# Altium PCB LaserTagJoystickBoard.PcbDoc
Units mil, origin at the board's own origin, x right, y up, seen from the top; angles counter-clockwise.
Board outline 600 x 900 mil, 2 copper layers (Top Layer, Bottom Layer); 2 components, 38 nets, 17 pads, 2 vias.
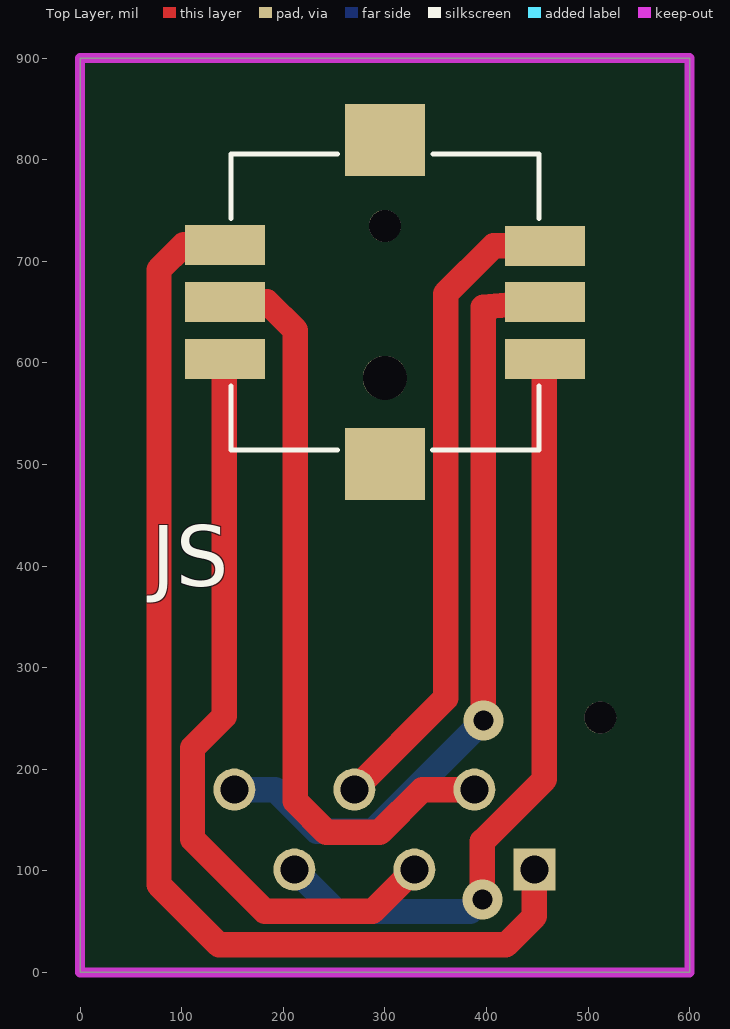
[diagram p0: Top Layer view]
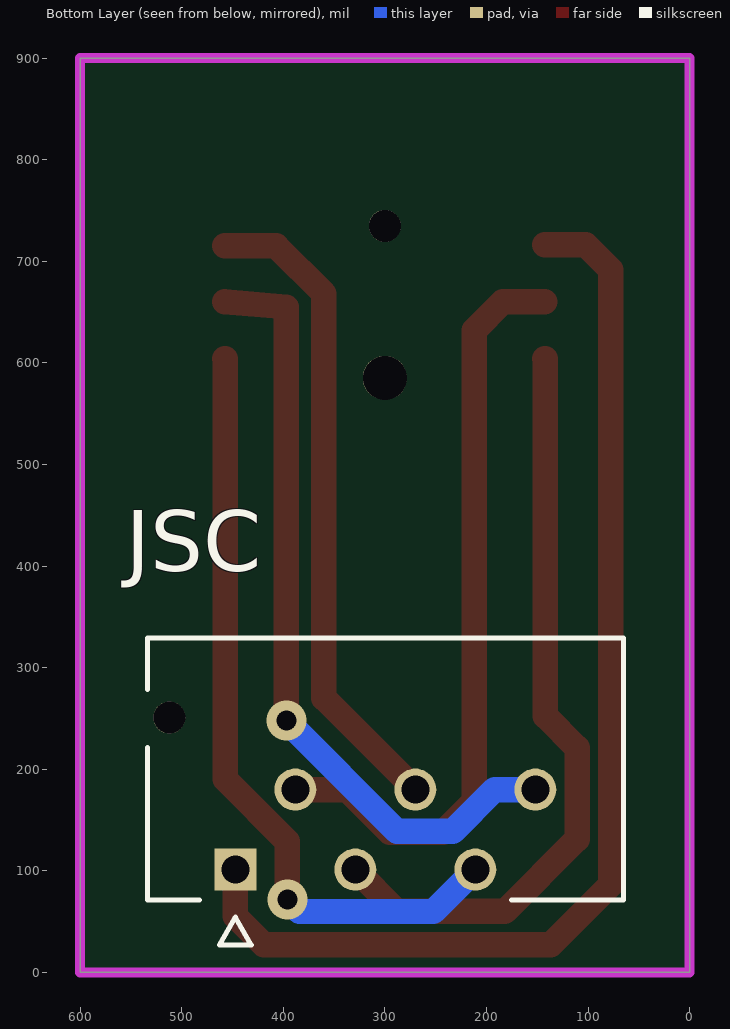
[diagram p1: Bottom Layer view, seen from below]

## Layer stack, top to bottom
Top Solder: solder mask 0.4, Solder Resist, Dk 3.5
Top Layer: signal copper 1.4
Dielectric 1: dielectric 12.6, FR-4, Dk 4.8
Bottom Layer: signal copper 1.4
Bottom Solder: solder mask 0.4, Solder Resist, Dk 3.5

## Board outline
0,0 600,0 600,900 0,900

## Design rules (kind name [scope] priority, off if disabled: settings)
BoardOutlineClearance [All] p1: gap=7.87 ignorepadtopadclearanceinfootprint=FALSE except(15.75: Arc-SplitBarrior Arc-SplitContinuation Track-SplitBarrior Track-SplitContinuation SMDPad-SplitBarrior SMDPad-SplitContinuation THPad-SplitBarrior THPad-SplitContinuation Via-SplitBarrior Via-SplitContinuation Fill-SplitBarrior Fill-SplitContinuation Poly-SplitBarrior Poly-SplitContinuation Region-SplitBarrior Region-SplitContinuation Text-SplitBarrior Text-SplitContinuation)
Clearance "Clearance Bottom Layer" [OnLayer('Bottom Layer')] p1: gap=8 ignorepadtopadclearanceinfootprint=TRUE except(10: Arc-Text Track-Text SMDPad-Text THPad-Text Via-Text Fill-Text Poly-Text Region-Text Text-Text)
Clearance "Clearance Top Layer" [OnLayer('Top Layer')] p2: gap=8 ignorepadtopadclearanceinfootprint=TRUE except(10: Arc-Text Track-Text SMDPad-Text THPad-Text Via-Text Fill-Text Poly-Text Region-Text Text-Text)
Clearance [All] p3: gap=7.87 ignorepadtopadclearanceinfootprint=FALSE except(3.5: Arc-Arc Arc-Track Arc-SMDPad Track-Track Track-SMDPad SMDPad-SMDPad; 5: Arc-Via Track-Via SMDPad-Via THPad-Via Via-Via; 10: Arc-Text Track-Text SMDPad-Text THPad-Text Via-Text Fill-Text Poly-Text Region-Text Text-Text)
HoleSize [All] p1: absolutevalues=TRUE maxlimit=248.03 minlimit=7.87 maxpercent=80.000 minpercent=20.000
MinimumAnnularRing [All] p1: minimumring=3
MinimumSolderMaskSliver [All] p1: minsoldermaskwidth=3.94
PolygonConnect PolygonConnect_1 [All] p1: thpad.connectstyle=Relief thpad.reliefconductorwidth=20 thpad.reliefentries=4 thpad.polygonreliefangle="90 Angle" thpad.airgapwidth=10 smdpad.connectstyle=Relief smdpad.reliefconductorwidth=20 smdpad.reliefentries=4 smdpad.polygonreliefangle="90 Angle" smdpad.airgapwidth=10 via.connectstyle=Direct via.reliefconductorwidth=20 via.reliefentries=4 via.polygonreliefangle="90 Angle" via.airgapwidth=10
RoutingCorners [All] p1: cornerstyle=Round minsetback=100 maxsetback=100
RoutingVias [All] p1: holewidth=19.68 width=39.37 viastyle="Through Hole" minholewidth=7.87 minwidth=17.72 maxholewidth=39.37 maxwidth=78.74
SilkToSilkClearance [All] p1: silktosilkclearance=3.94
SilkToSolderMaskClearance [IsPad] p1: minsilkscreentomaskgap=3.94 clearancetoexposedcopper=TRUE
SolderMaskExpansion [All] p1: expansion=4 istentingtop=FALSE
Width [All] p1: maxlimit=100 minlimit=3.5 preferedwidth=25 minimp=50.000000 maximp=50.000000 favimp=50.000000
25 further rules are at their usual default settings.

## Components (designator, comment, footprint, x,y, rotation, side; value= is the part's Value field where it differs from the comment)
JS "JS1400BFQ" SW_JS1400BFQ 300,660 r0 top
JSC "5031590600" MOLEX_5031590600 447.17,101.26 r180 bottom

## Footprints (in the part's own frame and the unit in brackets; to place one, negate y for a bottom-side part, rotate by r counter-clockwise, add the part's x,y. Pads: shape width x height; smd on the part's side, far side on the other; paste and mask are expansions set on the pad)
MOLEX_5031590600 [mm]
  rect 1.05x1.05 / inner round 1.05 / far side rect 1.05x1.05 hole 0.7 mask+0.076: 1(0,0)
  round 1.05 hole 0.7 mask+0.076: 2(1.5,2) 4(4.5,2) 6(7.5,2)
  round 1.05 hole 0.7 mask+0.101: 3(3,0) 5(6,0)
  round 0.8 hole 0.8 unplated mask+0.076: ""(-1.65,3.8)
  silkscreen extent -2.2,-1.89 9.7,5.79
SW_JS1400BFQ [mm]
  rect 2x1 smd: 1(-4,1.425) 2(-4,0) 3(-4,-1.425) 4(4,1.4) 5(4,0) 6(4,-1.425)
  rect 2x1.8 smd: SH1(0,4.05) SH2(0,-4.05)
  round 1.1 hole 1.1 unplated: ""(0,-1.9)
  round 0.8 hole 0.8 unplated: ""(0,1.9)
  silkscreen extent -3.85,-3.7 3.85,3.7

## Part data
JS: "Navigation Switch, 2 - Axis Digital (Mechanical Switch) Output", Package=None, Digi-Key_Part_Number=EG5858-ND, MF=E-Switch, MP=JS1400BFQ, SnapEDA_Link=https://www.snapeda.com/parts/JS1400BFQ/E-Switch/view-part/2768291/?ref=snap
JSC: "1.50mm Pitch, CLIK-Mate PCB Receptacle, Single Row, Through Hole, Vertical, Tin Plating, Positive Lock, with Peg, 6 Circuits, Natural", Package=None, Availability=Unavailable, MP=5031590600, Price=None

## Via types
v1: diameter 39.37, hole 19.68, Top Layer to Bottom Layer, 2 vias

## Nets (pads, with @x,y where several pads share a name; then routed paths per layer and width w, separated by ;. In a path a pad name is that pad's centre, name@x,y a point inside that pad or via, vN(x,y) a via of type N, cw(c..) or ccw(c..) an arc to the next point about the centre after c; other vN are vias at no path point)
3V: 
3VESP: 
BAT: 
CENTER: JS.2 JSC.2 | length 750.8
  Top Layer w25: JS.2 184,660 211.89,632.11 211.89,168.45 242.34,138 295,138 337,180 JSC.2
CLIP: 
DATAIN: 
DATAOUT: 
DOUT1: 
DOUT2: 
DOWN: JS.6 JSC.5 | length 764.8
  Top Layer w25: v1(396,72) 396,129 457,190 457,603.9 JS.6
  Bottom Layer w25: JSC.5 252.2,60 384,60 v1(396,72)
GND: JS.5 JSC.6 | length 775.2
  Top Layer w25: v1(397,247.83) 397,655 JS.5
  Bottom Layer w25: JSC.6 192,180 233.17,138.83 288,138.83 v1(397,247.83)
IRE: 
IRR: 
JS1: 
JS2: 
JS3: 
JS4: 
JS5: 
LEFT: JS.1 JSC.1 | length 1132.1
  Top Layer w25: JS.1 102.1,716.1 77.72,691.72 77.72,86.14 136.77,27.09 419.09,27.09 447.17,55.17 JSC.1
NEOPIX: 
"Net4.7K PDR_1": 
Net10K_1: 
Net10K_2: 
"NetLaser Pointer_2": 
NP: 
NP2: 
NP3: 
PRIMER: 
RIGHT: JS.3 JSC.3 | length 751
  Top Layer w25: JS.3 142,603.9 142,252.28 110.72,221 110.72,131.28 181.91,60.09 287.89,60.09 JSC.3
RST: 
SCL: 
SDA: 
SPKR1: 
SPKR2: 
"SPKR Rx": 
"SPKR Tx": 
TRIGGER: 
UP: JS.4 JSC.4 | length 642.3
  Top Layer w25: JSC.4 360,270 360,668.1 407,715.1 JS.4
pads on no net: JS. JS.SH1 JS.SH2 JSC.

## Keep-outs
Keep-Out Layer:
  the board outline again, w10